# Altium PCB RK3399-core.PcbDoc
Units mm, origin at the board's own origin, x right, y up, seen from the top; angles counter-clockwise.
Board outline 50 x 50 mm, 2 copper layers (Top Layer, Bottom Layer); 6 components, 15 nets, 1337 pads, 0 vias.
Unrouted connection lines stored in the file: 307.
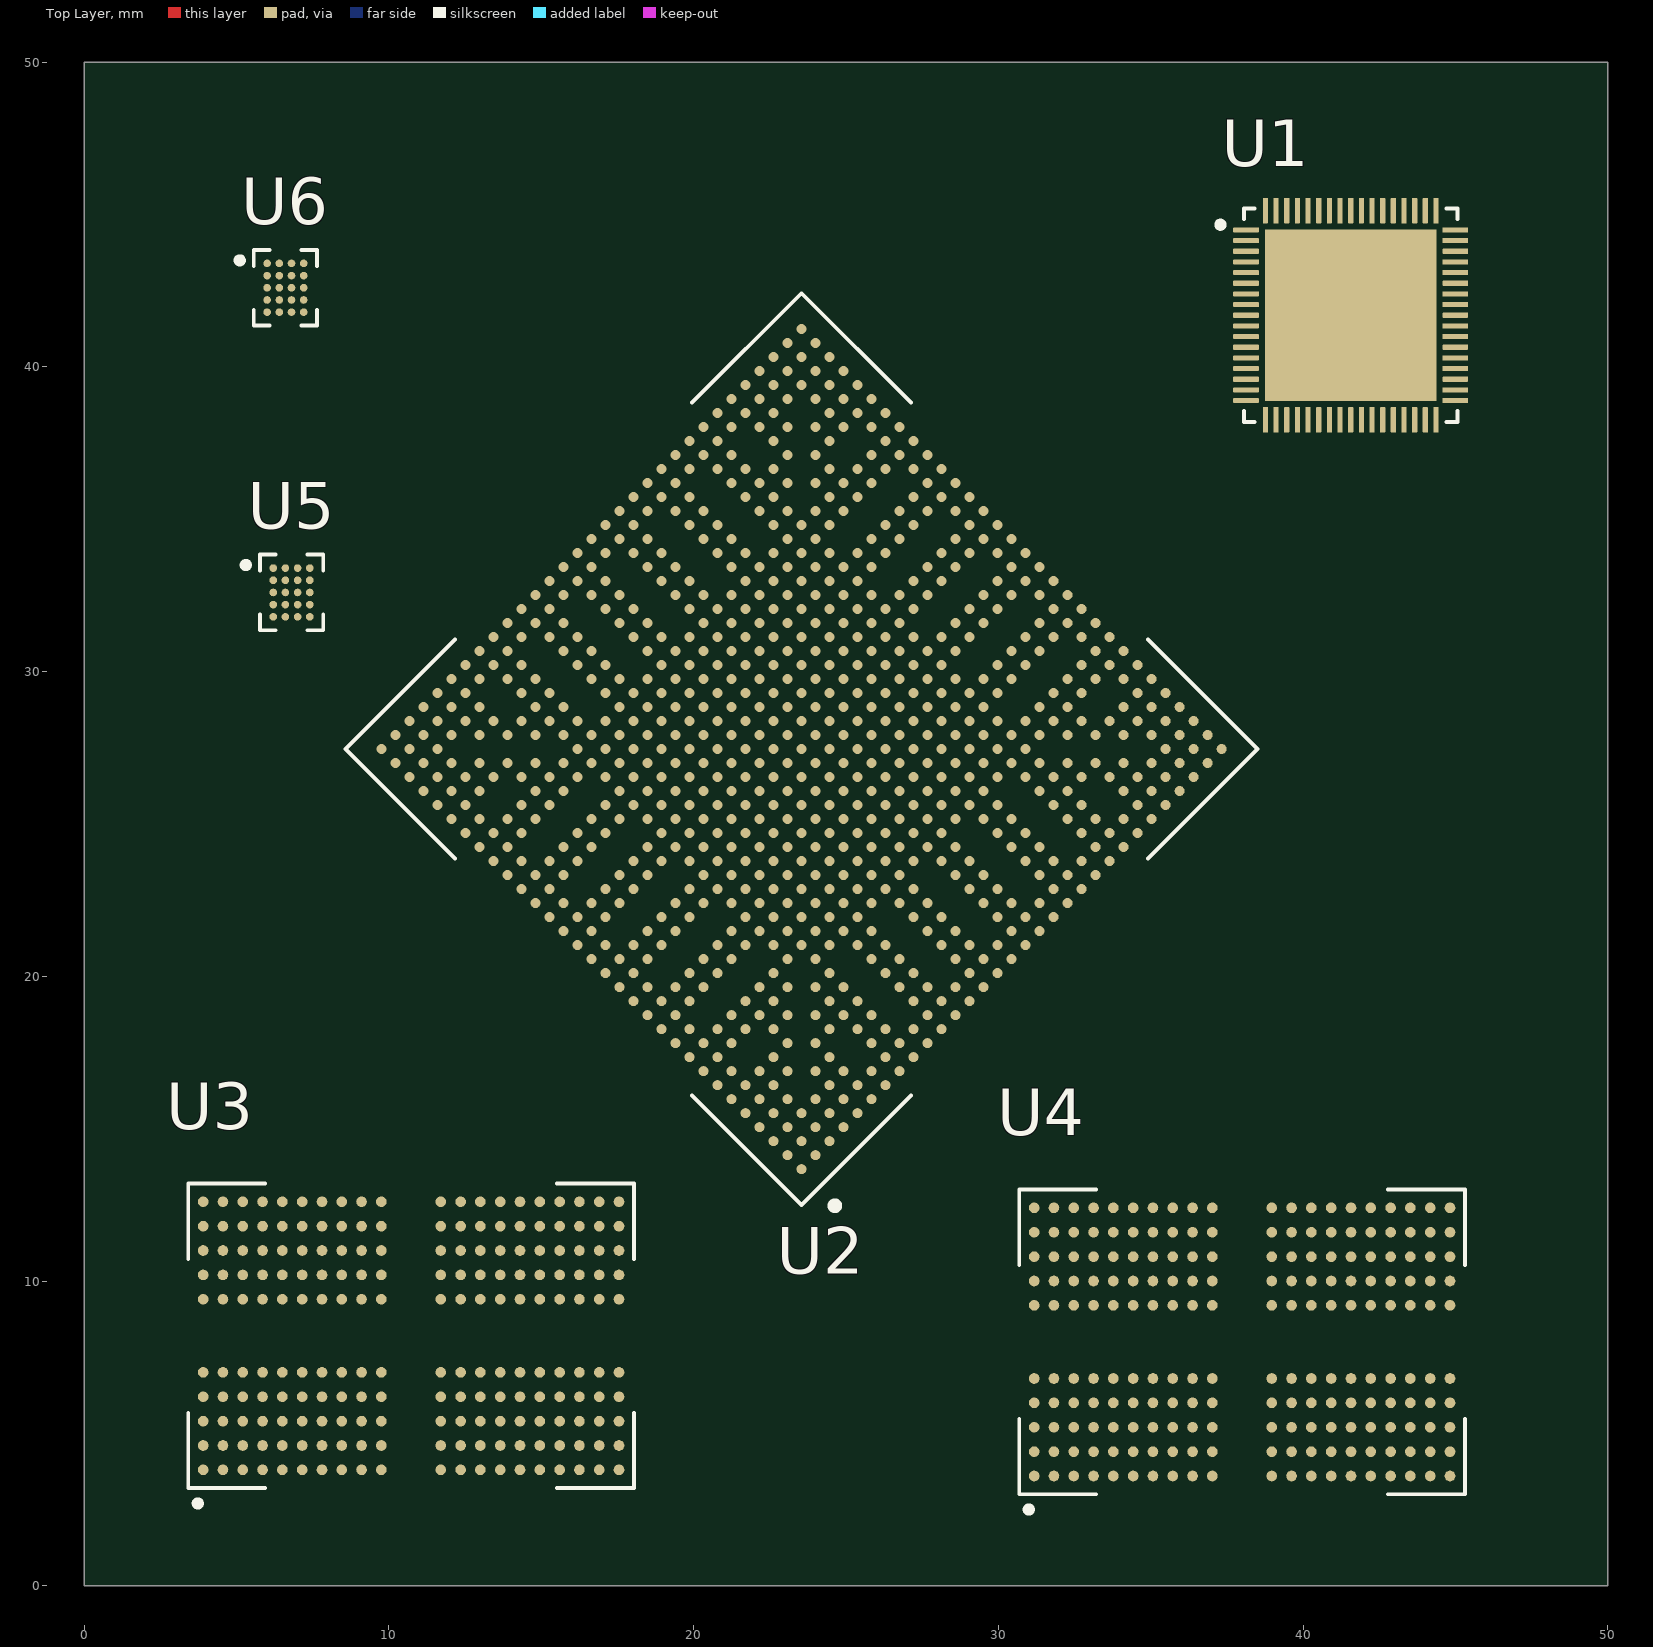
[diagram p0: Top Layer view]
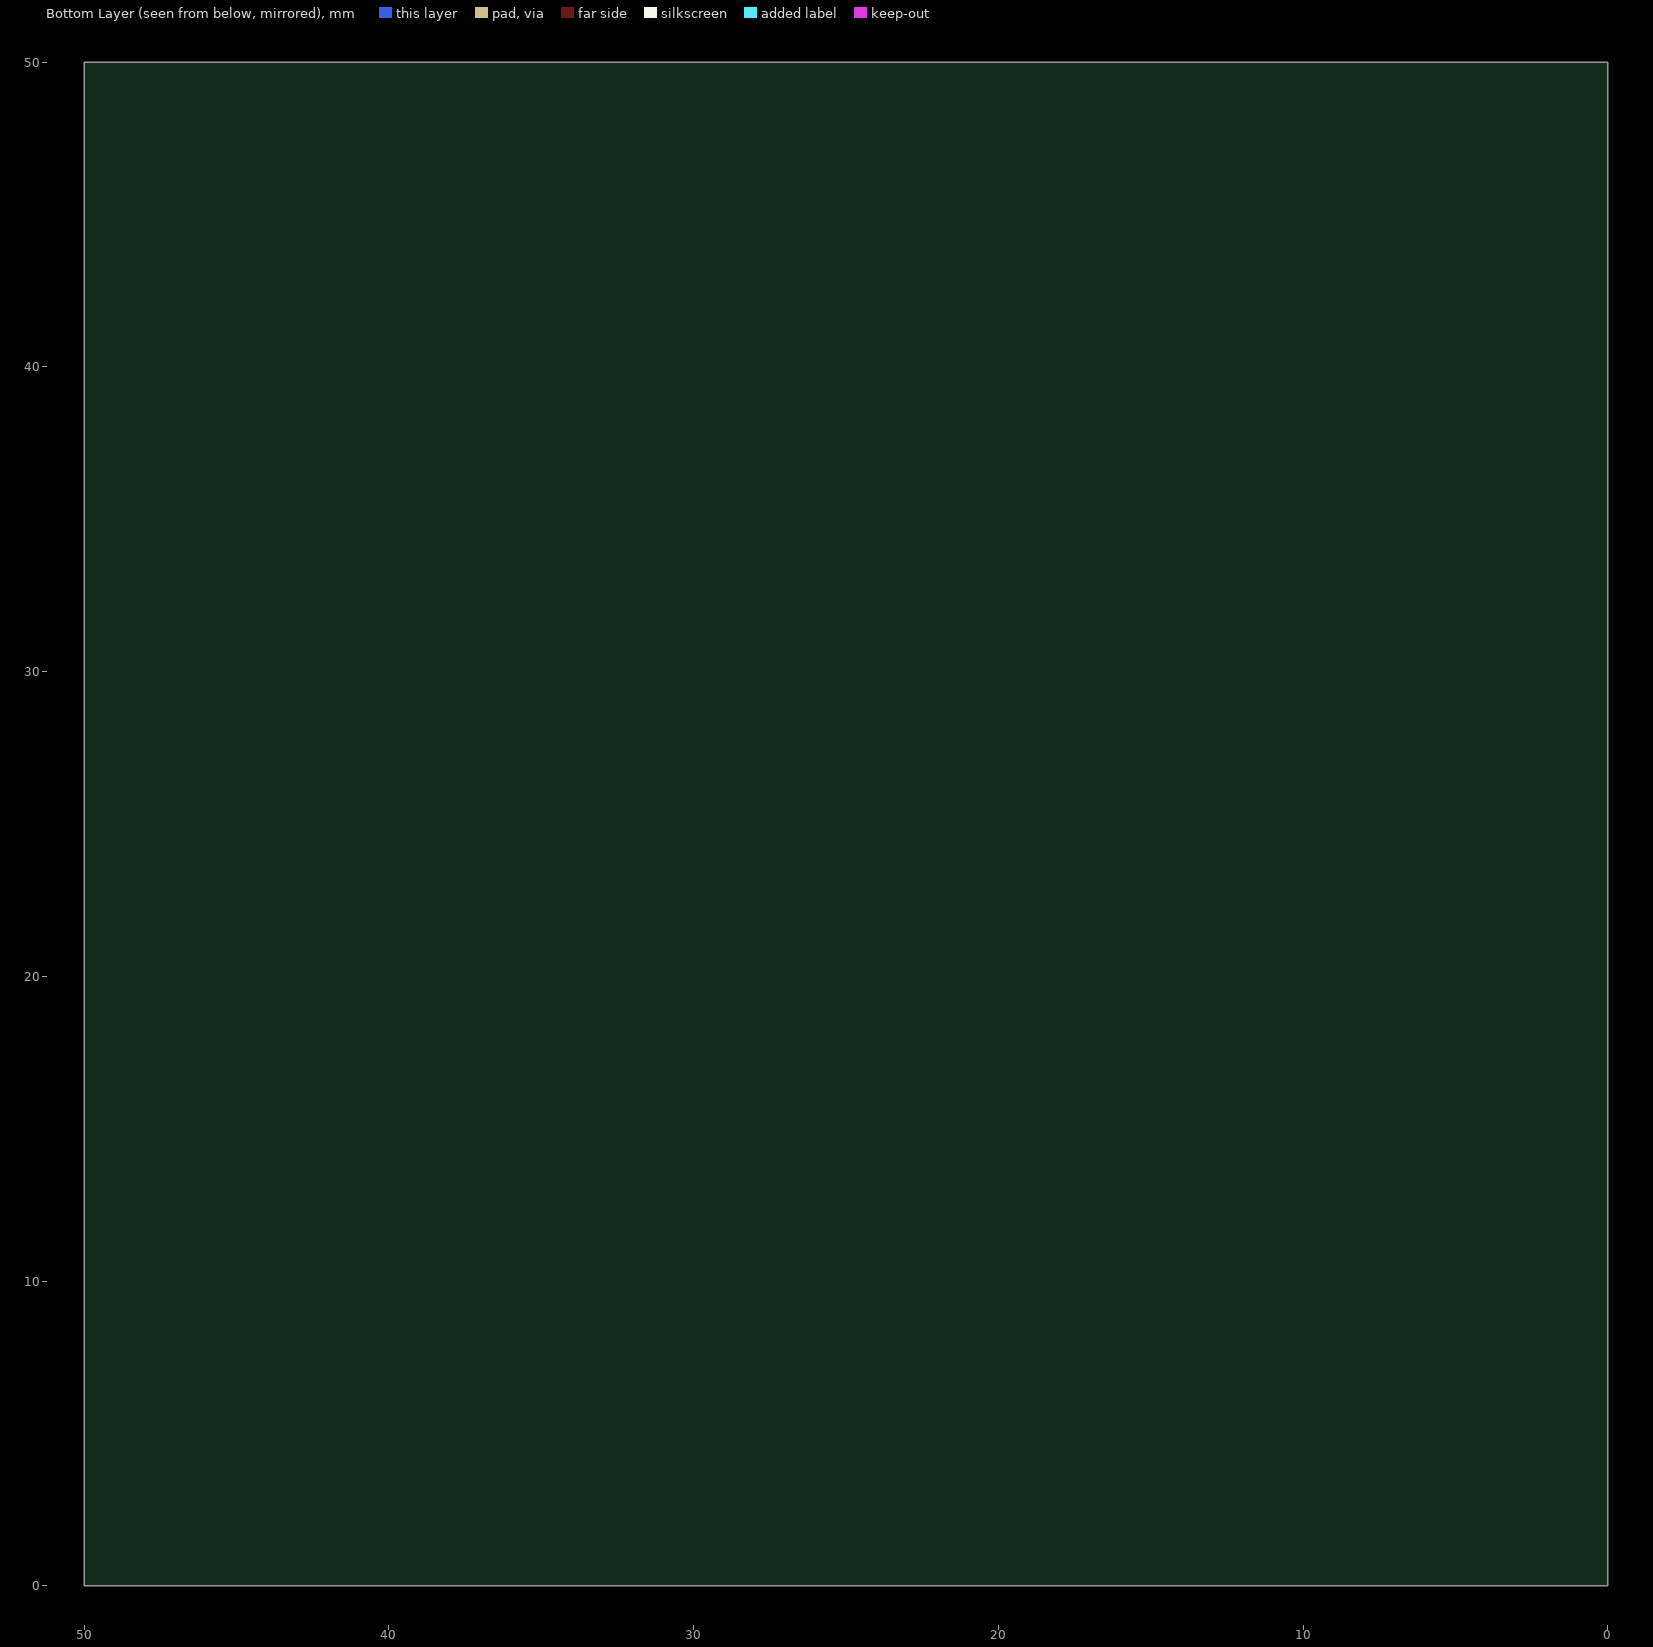
[diagram p1: Bottom Layer view, seen from below]

## Layer stack, top to bottom
Top Solder: solder mask 0.0102, Solder Resist, Dk 3.5
Top Layer: signal copper 0.0356
Dielectric 1: dielectric 0.32, FR-4, Dk 4.8
Bottom Layer: signal copper 0.0356
Bottom Solder: solder mask 0.0102, Solder Resist, Dk 3.5

## Board outline
0,0 50,0 50,50 0,50

## Design rules (kind name [scope] priority, off if disabled: settings)
Clearance [All] p1: gap=0.254 ignorepadtopadclearanceinfootprint=FALSE except(0: Arc-Hole Track-Hole SMDPad-Hole THPad-Hole Via-Hole Fill-Hole Poly-Hole Region-Hole Text-Hole)
PolygonConnect [All] p1: connectstyle=Relief reliefconductorwidth=0.254 reliefentries=4 polygonreliefangle="90 Angle" airgapwidth=0.254
RoutingVias [All] p1: holewidth=0.711 width=1.27 viastyle="Through Hole" minholewidth=0.711 minwidth=1.27 maxholewidth=0.711 maxwidth=1.27
SolderMaskExpansion [All] p1: expansion=0.102 istentingtop=FALSE
Width [All] p1: maxlimit=0.254 minlimit=0.254 preferedwidth=0.254
30 further rules are at their usual default settings.

## Classes and differential pairs
component class 10.LPDDR4: U3 U4
component class "03.RK3399 Power": U2
component class "02.PMIC PMU": U1 U5 U6

## Components (designator, comment, footprint, x,y, rotation, side; value= is the part's Value field where it differs from the comment)
U1 "RK808-D" QFN35P700X700X80-69N 41.565,41.7 r0 top
U2 "RK3399" BGA828C65P31X31_2100X2100X161N 23.54,27.46 r135 top
U3 "MT53D1024M32D4DT-046_AUT_D" IC_MT53D1024M32D4DT-046_AUT_D 10.725,8.2 r90 top
U4 "MT53D1024M32D4DT-046_AUT_D" IC_MT53D1024M32D4DT-046_AUT_D 38,8 r90 top
U5 "SYR837PKC" BGA20N40P5X4_196X156X66N 6.8,32.6 r0 top
U6 "SYR838PKC" BGA20N40P5X4_196X156X66N 6.6,42.6 r0 top

## Footprints (in the part's own frame and the unit in brackets; to place one, negate y for a bottom-side part, rotate by r counter-clockwise, add the part's x,y. Pads: shape width x height; smd on the part's side, far side on the other; paste and mask are expansions set on the pad)
BGA20N40P5X4_196X156X66N [mm]
  round 0.25 smd: A1(-0.6,0.8) A2(-0.2,0.8) A3(0.2,0.8) A4(0.6,0.8) B1(-0.6,0.4) B2(-0.2,0.4) B3(0.2,0.4) B4(0.6,0.4) C1(-0.6,0) C2(-0.2,0) C3(0.2,0) C4(0.6,0) D1(-0.6,-0.4) D2(-0.2,-0.4) D3(0.2,-0.4) D4(0.6,-0.4) E1(-0.6,-0.8) E2(-0.2,-0.8) E3(0.2,-0.8) E4(0.6,-0.8)
  silkscreen extent -1.6,-1.24 1.04,1.24
BGA828C65P31X31_2100X2100X161N [mm]
  round 0.33 smd: A1(-9.75,9.75) A2(-9.1,9.75) A3(-8.45,9.75) A4(-7.8,9.75) A5(-7.15,9.75) A6(-6.5,9.75) A7(-5.85,9.75) A8(-5.2,9.75) A9(-4.55,9.75) A10(-3.9,9.75) A11(-3.25,9.75) A12(-2.6,9.75) A13(-1.95,9.75) A14(-1.3,9.75) A15(-0.65,9.75) A16(0,9.75) A17(0.65,9.75) A18(1.3,9.75) A19(1.95,9.75) A20(2.6,9.75) A21(3.25,9.75) A22(3.9,9.75) A23(4.55,9.75) A24(5.2,9.75) A25(5.85,9.75) A26(6.5,9.75) A27(7.15,9.75) A28(7.8,9.75) A29(8.45,9.75) A30(9.1,9.75) A31(9.75,9.75) AA1(-9.75,-3.25) AA2(-9.1,-3.25) AA3(-8.45,-3.25) AA4(-7.8,-3.25) AA5(-7.15,-3.25) AA6(-6.5,-3.25) AA7(-5.85,-3.25) AA8(-5.2,-3.25) AA9(-4.55,-3.25) AA10(-3.9,-3.25) AA11(-3.25,-3.25) AA12(-2.6,-3.25) AA13(-1.95,-3.25) AA14(-1.3,-3.25) AA15(-0.65,-3.25) AA16(0,-3.25) AA17(0.65,-3.25) AA18(1.3,-3.25) AA19(1.95,-3.25) AA20(2.6,-3.25) AA21(3.25,-3.25) AA22(3.9,-3.25) AA23(4.55,-3.25) AA24(5.2,-3.25) AA25(5.85,-3.25) AA26(6.5,-3.25) AA27(7.15,-3.25) AA28(7.8,-3.25) AA29(8.45,-3.25) AA30(9.1,-3.25) AA31(9.75,-3.25) AB1(-9.75,-3.9) AB2(-9.1,-3.9) AB8(-5.2,-3.9) AB9(-4.55,-3.9) AB10(-3.9,-3.9) AB11(-3.25,-3.9) AB12(-2.6,-3.9) AB13(-1.95,-3.9) AB14(-1.3,-3.9) AB15(-0.65,-3.9) AB16(0,-3.9) AB17(0.65,-3.9) AB18(1.3,-3.9) AB19(1.95,-3.9) AB20(2.6,-3.9) AB21(3.25,-3.9) AB22(3.9,-3.9) AB23(4.55,-3.9) AB24(5.2,-3.9) AB30(9.1,-3.9) AB31(9.75,-3.9) AC1(-9.75,-4.55) AC2(-9.1,-4.55) AC3(-8.45,-4.55) AC4(-7.8,-4.55) AC5(-7.15,-4.55) AC6(-6.5,-4.55) AC7(-5.85,-4.55) AC8(-5.2,-4.55) AC9(-4.55,-4.55) AC10(-3.9,-4.55) AC11(-3.25,-4.55) AC12(-2.6,-4.55) AC13(-1.95,-4.55) AC14(-1.3,-4.55) AC15(-0.65,-4.55) AC16(0,-4.55) AC17(0.65,-4.55) AC18(1.3,-4.55) AC19(1.95,-4.55) AC20(2.6,-4.55) AC21(3.25,-4.55) AC22(3.9,-4.55) AC23(4.55,-4.55) AC24(5.2,-4.55) AC25(5.85,-4.55) AC26(6.5,-4.55) AC27(7.15,-4.55) AC28(7.8,-4.55) AC29(8.45,-4.55) AC30(9.1,-4.55) AC31(9.75,-4.55) AD1(-9.75,-5.2) AD2(-9.1,-5.2) AD3(-8.45,-5.2) AD4(-7.8,-5.2) AD5(-7.15,-5.2) AD6(-6.5,-5.2) AD7(-5.85,-5.2) AD8(-5.2,-5.2) AD9(-4.55,-5.2) AD10(-3.9,-5.2) AD11(-3.25,-5.2) AD12(-2.6,-5.2) AD13(-1.95,-5.2) AD14(-1.3,-5.2) AD15(-0.65,-5.2) AD16(0,-5.2) AD17(0.65,-5.2) AD18(1.3,-5.2) AD19(1.95,-5.2) AD20(2.6,-5.2) AD21(3.25,-5.2) AD22(3.9,-5.2) AD23(4.55,-5.2) AD24(5.2,-5.2) AD25(5.85,-5.2) AD26(6.5,-5.2) AD27(7.15,-5.2) AD28(7.8,-5.2) AD29(8.45,-5.2) AD30(9.1,-5.2) AD31(9.75,-5.2) AE1(-9.75,-5.85) AE2(-9.1,-5.85) AE5(-7.15,-5.85) AE6(-6.5,-5.85) AE8(-5.2,-5.85) AE9(-4.55,-5.85) AE11(-3.25,-5.85) AE12(-2.6,-5.85) AE14(-1.3,-5.85) AE15(-0.65,-5.85) AE17(0.65,-5.85) AE18(1.3,-5.85) AE20(2.6,-5.85) AE21(3.25,-5.85) AE23(4.55,-5.85) AE24(5.2,-5.85) AE26(6.5,-5.85) AE27(7.15,-5.85) AE30(9.1,-5.85) AE31(9.75,-5.85) AF1(-9.75,-6.5) AF2(-9.1,-6.5) AF3(-8.45,-6.5) AF4(-7.8,-6.5) AF5(-7.15,-6.5) AF7(-5.85,-6.5) AF8(-5.2,-6.5) AF9(-4.55,-6.5) AF11(-3.25,-6.5) AF12(-2.6,-6.5) AF14(-1.3,-6.5) AF15(-0.65,-6.5) AF17(0.65,-6.5) AF18(1.3,-6.5) AF20(2.6,-6.5) AF21(3.25,-6.5) AF23(4.55,-6.5) AF24(5.2,-6.5) AF25(5.85,-6.5) AF27(7.15,-6.5) AF28(7.8,-6.5) AF29(8.45,-6.5) AF30(9.1,-6.5) AF31(9.75,-6.5) AG1(-9.75,-7.15) AG2(-9.1,-7.15) AG3(-8.45,-7.15) AG4(-7.8,-7.15) AG6(-6.5,-7.15) AG7(-5.85,-7.15) AG8(-5.2,-7.15) AG9(-4.55,-7.15) AG11(-3.25,-7.15) AG12(-2.6,-7.15) AG14(-1.3,-7.15) AG15(-0.65,-7.15) AG17(0.65,-7.15) AG18(1.3,-7.15) AG20(2.6,-7.15) AG21(3.25,-7.15) AG23(4.55,-7.15) AG24(5.2,-7.15) AG25(5.85,-7.15) AG26(6.5,-7.15) AG28(7.8,-7.15) AG29(8.45,-7.15) AG30(9.1,-7.15) AG31(9.75,-7.15) AH1(-9.75,-7.8) AH2(-9.1,-7.8) AH3(-8.45,-7.8) AH5(-7.15,-7.8) AH6(-6.5,-7.8) AH8(-5.2,-7.8) AH9(-4.55,-7.8) AH11(-3.25,-7.8) AH12(-2.6,-7.8) AH14(-1.3,-7.8) AH15(-0.65,-7.8) AH17(0.65,-7.8) AH18(1.3,-7.8) AH20(2.6,-7.8) AH21(3.25,-7.8) AH23(4.55,-7.8) AH24(5.2,-7.8) AH26(6.5,-7.8) AH27(7.15,-7.8) AH29(8.45,-7.8) AH30(9.1,-7.8) AH31(9.75,-7.8) AJ1(-9.75,-8.45) AJ2(-9.1,-8.45) AJ3(-8.45,-8.45) AJ4(-7.8,-8.45) AJ5(-7.15,-8.45) AJ6(-6.5,-8.45) AJ8(-5.2,-8.45) AJ9(-4.55,-8.45) AJ11(-3.25,-8.45) AJ12(-2.6,-8.45) AJ14(-1.3,-8.45) AJ15(-0.65,-8.45) AJ17(0.65,-8.45) AJ18(1.3,-8.45) AJ20(2.6,-8.45) AJ21(3.25,-8.45) AJ23(4.55,-8.45) AJ24(5.2,-8.45) AJ26(6.5,-8.45) AJ27(7.15,-8.45) AJ28(7.8,-8.45) AJ29(8.45,-8.45) AJ30(9.1,-8.45) AJ31(9.75,-8.45) AK1(-9.75,-9.1) AK2(-9.1,-9.1) AK3(-8.45,-9.1) AK4(-7.8,-9.1) AK5(-7.15,-9.1) AK6(-6.5,-9.1) AK7(-5.85,-9.1) AK8(-5.2,-9.1) AK9(-4.55,-9.1) AK10(-3.9,-9.1) AK11(-3.25,-9.1) AK12(-2.6,-9.1) AK13(-1.95,-9.1) AK14(-1.3,-9.1) AK15(-0.65,-9.1) AK16(0,-9.1) AK17(0.65,-9.1) AK18(1.3,-9.1) AK19(1.95,-9.1) AK20(2.6,-9.1) AK21(3.25,-9.1) AK22(3.9,-9.1) AK23(4.55,-9.1) AK24(5.2,-9.1) AK25(5.85,-9.1) AK26(6.5,-9.1) AK27(7.15,-9.1) AK28(7.8,-9.1) AK29(8.45,-9.1) AK30(9.1,-9.1) AK31(9.75,-9.1) AL1(-9.75,-9.75) AL2(-9.1,-9.75) AL3(-8.45,-9.75) AL4(-7.8,-9.75) AL5(-7.15,-9.75) AL6(-6.5,-9.75) AL7(-5.85,-9.75) AL8(-5.2,-9.75) AL9(-4.55,-9.75) AL10(-3.9,-9.75) AL11(-3.25,-9.75) AL12(-2.6,-9.75) AL13(-1.95,-9.75) AL14(-1.3,-9.75) AL15(-0.65,-9.75) AL16(0,-9.75) AL17(0.65,-9.75) AL18(1.3,-9.75) AL19(1.95,-9.75) AL20(2.6,-9.75) AL21(3.25,-9.75) AL22(3.9,-9.75) AL23(4.55,-9.75) AL24(5.2,-9.75) AL25(5.85,-9.75) AL26(6.5,-9.75) AL27(7.15,-9.75) AL28(7.8,-9.75) AL29(8.45,-9.75) AL30(9.1,-9.75) AL31(9.75,-9.75) B1(-9.75,9.1) B2(-9.1,9.1) B3(-8.45,9.1) B4(-7.8,9.1) B5(-7.15,9.1) B6(-6.5,9.1) B7(-5.85,9.1) B8(-5.2,9.1) B9(-4.55,9.1) B10(-3.9,9.1) B11(-3.25,9.1) B12(-2.6,9.1) B13(-1.95,9.1) B14(-1.3,9.1) B15(-0.65,9.1) B16(0,9.1) B17(0.65,9.1) B18(1.3,9.1) B19(1.95,9.1) B20(2.6,9.1) B21(3.25,9.1) B22(3.9,9.1) B23(4.55,9.1) B24(5.2,9.1) B25(5.85,9.1) B26(6.5,9.1) B27(7.15,9.1) B28(7.8,9.1) B29(8.45,9.1) B30(9.1,9.1) B31(9.75,9.1) C1(-9.75,8.45) C2(-9.1,8.45) C3(-8.45,8.45) C4(-7.8,8.45) C5(-7.15,8.45) C6(-6.5,8.45) C8(-5.2,8.45) C9(-4.55,8.45) C11(-3.25,8.45) C12(-2.6,8.45) C14(-1.3,8.45) C15(-0.65,8.45) C17(0.65,8.45) C18(1.3,8.45) C20(2.6,8.45) C21(3.25,8.45) C23(4.55,8.45) C24(5.2,8.45) C26(6.5,8.45) C27(7.15,8.45) C28(7.8,8.45) C29(8.45,8.45) C30(9.1,8.45) C31(9.75,8.45) D1(-9.75,7.8) D2(-9.1,7.8) D3(-8.45,7.8) D5(-7.15,7.8) D6(-6.5,7.8) D8(-5.2,7.8) D9(-4.55,7.8) D11(-3.25,7.8) D12(-2.6,7.8) D14(-1.3,7.8) D15(-0.65,7.8) D17(0.65,7.8) D18(1.3,7.8) D20(2.6,7.8) D21(3.25,7.8) D23(4.55,7.8) D24(5.2,7.8) D26(6.5,7.8) D27(7.15,7.8) D29(8.45,7.8) D30(9.1,7.8) D31(9.75,7.8) E1(-9.75,7.15) E2(-9.1,7.15) E3(-8.45,7.15) E4(-7.8,7.15) E6(-6.5,7.15) E7(-5.85,7.15) E8(-5.2,7.15) E9(-4.55,7.15) E11(-3.25,7.15) E12(-2.6,7.15) E14(-1.3,7.15) E15(-0.65,7.15) E17(0.65,7.15) E18(1.3,7.15) E20(2.6,7.15) E21(3.25,7.15) E23(4.55,7.15) E24(5.2,7.15) E25(5.85,7.15) E26(6.5,7.15) E28(7.8,7.15) E29(8.45,7.15) E30(9.1,7.15) E31(9.75,7.15) F1(-9.75,6.5) F2(-9.1,6.5) F3(-8.45,6.5) F4(-7.8,6.5) F5(-7.15,6.5) F7(-5.85,6.5) F8(-5.2,6.5) F9(-4.55,6.5) F11(-3.25,6.5) F12(-2.6,6.5) F14(-1.3,6.5) F15(-0.65,6.5) F17(0.65,6.5) F18(1.3,6.5) F20(2.6,6.5) F21(3.25,6.5) F23(4.55,6.5) F24(5.2,6.5) F25(5.85,6.5) F27(7.15,6.5) F28(7.8,6.5) F29(8.45,6.5) F30(9.1,6.5) F31(9.75,6.5) G1(-9.75,5.85) G2(-9.1,5.85) G5(-7.15,5.85) G6(-6.5,5.85) G8(-5.2,5.85) G9(-4.55,5.85) G11(-3.25,5.85) G12(-2.6,5.85) G14(-1.3,5.85) G15(-0.65,5.85) G17(0.65,5.85) G18(1.3,5.85) G20(2.6,5.85) G21(3.25,5.85) G23(4.55,5.85) G24(5.2,5.85) G26(6.5,5.85) G27(7.15,5.85) G30(9.1,5.85) G31(9.75,5.85) H1(-9.75,5.2) H2(-9.1,5.2) H3(-8.45,5.2) H4(-7.8,5.2) H5(-7.15,5.2) H6(-6.5,5.2) H7(-5.85,5.2) H9(-4.55,5.2) H10(-3.9,5.2) H11(-3.25,5.2) H12(-2.6,5.2) H13(-1.95,5.2) H14(-1.3,5.2) H15(-0.65,5.2) H16(0,5.2) H17(0.65,5.2) H18(1.3,5.2) H19(1.95,5.2) H20(2.6,5.2) H21(3.25,5.2) H22(3.9,5.2) H23(4.55,5.2) H24(5.2,5.2) H25(5.85,5.2) H26(6.5,5.2) H27(7.15,5.2) H28(7.8,5.2) H29(8.45,5.2) H30(9.1,5.2) H31(9.75,5.2) J1(-9.75,4.55) J2(-9.1,4.55) J3(-8.45,4.55) J4(-7.8,4.55) J5(-7.15,4.55) J6(-6.5,4.55) J7(-5.85,4.55) J8(-5.2,4.55) J9(-4.55,4.55) J10(-3.9,4.55) J11(-3.25,4.55) J12(-2.6,4.55) J13(-1.95,4.55) J14(-1.3,4.55) J15(-0.65,4.55) J16(0,4.55) J17(0.65,4.55) J18(1.3,4.55) J19(1.95,4.55) J20(2.6,4.55) J21(3.25,4.55) J22(3.9,4.55) J23(4.55,4.55) J24(5.2,4.55) J25(5.85,4.55) J26(6.5,4.55) J27(7.15,4.55) J28(7.8,4.55) J29(8.45,4.55) J30(9.1,4.55) J31(9.75,4.55) K1(-9.75,3.9) K2(-9.1,3.9) K8(-5.2,3.9) K9(-4.55,3.9) K10(-3.9,3.9) K11(-3.25,3.9) K12(-2.6,3.9) K13(-1.95,3.9) K14(-1.3,3.9) K15(-0.65,3.9) K16(0,3.9) K17(0.65,3.9) K18(1.3,3.9) K19(1.95,3.9) K20(2.6,3.9) K21(3.25,3.9) K22(3.9,3.9) K23(4.55,3.9) K24(5.2,3.9) K30(9.1,3.9) K31(9.75,3.9) L1(-9.75,3.25) L2(-9.1,3.25) L3(-8.45,3.25) L4(-7.8,3.25) L5(-7.15,3.25) L6(-6.5,3.25) L7(-5.85,3.25) L8(-5.2,3.25) L9(-4.55,3.25) L10(-3.9,3.25) L11(-3.25,3.25) L12(-2.6,3.25) L13(-1.95,3.25) L14(-1.3,3.25) L15(-0.65,3.25) L16(0,3.25) L17(0.65,3.25) L18(1.3,3.25) L19(1.95,3.25) L20(2.6,3.25) L21(3.25,3.25) L22(3.9,3.25) L23(4.55,3.25) L24(5.2,3.25) L25(5.85,3.25) L26(6.5,3.25) L27(7.15,3.25) L28(7.8,3.25) L29(8.45,3.25) L30(9.1,3.25) L31(9.75,3.25) M1(-9.75,2.6) M2(-9.1,2.6) M3(-8.45,2.6) M4(-7.8,2.6) M5(-7.15,2.6) M6(-6.5,2.6) M7(-5.85,2.6) M8(-5.2,2.6) M9(-4.55,2.6) M10(-3.9,2.6) M11(-3.25,2.6) M12(-2.6,2.6) M13(-1.95,2.6) M14(-1.3,2.6) M15(-0.65,2.6) M16(0,2.6) M17(0.65,2.6) M18(1.3,2.6) M19(1.95,2.6) M20(2.6,2.6) M21(3.25,2.6) M22(3.9,2.6) M23(4.55,2.6) M24(5.2,2.6) M25(5.85,2.6) M26(6.5,2.6) M27(7.15,2.6) M28(7.8,2.6) M29(8.45,2.6) M30(9.1,2.6) M31(9.75,2.6) N1(-9.75,1.95) N2(-9.1,1.95) N8(-5.2,1.95) N9(-4.55,1.95) N10(-3.9,1.95) N11(-3.25,1.95) N12(-2.6,1.95) N13(-1.95,1.95) N14(-1.3,1.95) N15(-0.65,1.95) N16(0,1.95) N17(0.65,1.95) N18(1.3,1.95) N19(1.95,1.95) N20(2.6,1.95) N21(3.25,1.95) N22(3.9,1.95) N23(4.55,1.95) N24(5.2,1.95) N30(9.1,1.95) N31(9.75,1.95) P1(-9.75,1.3) P2(-9.1,1.3) P3(-8.45,1.3) P4(-7.8,1.3) P5(-7.15,1.3) P6(-6.5,1.3) P7(-5.85,1.3) P8(-5.2,1.3) P9(-4.55,1.3) P10(-3.9,1.3) P11(-3.25,1.3) P12(-2.6,1.3) P13(-1.95,1.3) P14(-1.3,1.3) P15(-0.65,1.3) P16(0,1.3) P17(0.65,1.3) P18(1.3,1.3) P19(1.95,1.3) P20(2.6,1.3) P21(3.25,1.3) P22(3.9,1.3) P23(4.55,1.3) P24(5.2,1.3) P25(5.85,1.3) P26(6.5,1.3) P27(7.15,1.3) P28(7.8,1.3) P29(8.45,1.3) P30(9.1,1.3) P31(9.75,1.3) R1(-9.75,0.65) R2(-9.1,0.65) R3(-8.45,0.65) R4(-7.8,0.65) R5(-7.15,0.65) R6(-6.5,0.65) R7(-5.85,0.65) R8(-5.2,0.65) R9(-4.55,0.65) R10(-3.9,0.65) R11(-3.25,0.65) R12(-2.6,0.65) R13(-1.95,0.65) R14(-1.3,0.65) R15(-0.65,0.65) R16(0,0.65) R17(0.65,0.65) R18(1.3,0.65) R19(1.95,0.65) R20(2.6,0.65) R21(3.25,0.65) R22(3.9,0.65) R23(4.55,0.65) R24(5.2,0.65) R25(5.85,0.65) R26(6.5,0.65) R27(7.15,0.65) R28(7.8,0.65) R29(8.45,0.65) R30(9.1,0.65) R31(9.75,0.65) T1(-9.75,0) T2(-9.1,0) T8(-5.2,0) T9(-4.55,0) T10(-3.9,0) T11(-3.25,0) T12(-2.6,0) T13(-1.95,0) T14(-1.3,0) T15(-0.65,0) T16(0,0) T17(0.65,0) T18(1.3,0) T19(1.95,0) T20(2.6,0) T21(3.25,0) T22(3.9,0) T23(4.55,0) T24(5.2,0) T30(9.1,0) T31(9.75,0) U1(-9.75,-0.65) U2(-9.1,-0.65) U3(-8.45,-0.65) U4(-7.8,-0.65) U5(-7.15,-0.65) U6(-6.5,-0.65) U7(-5.85,-0.65) U8(-5.2,-0.65) U9(-4.55,-0.65) U10(-3.9,-0.65) U11(-3.25,-0.65) U12(-2.6,-0.65) U13(-1.95,-0.65) U14(-1.3,-0.65) U15(-0.65,-0.65) U16(0,-0.65) U17(0.65,-0.65) U18(1.3,-0.65) U19(1.95,-0.65) U20(2.6,-0.65) U21(3.25,-0.65) U22(3.9,-0.65) U23(4.55,-0.65) U24(5.2,-0.65) U25(5.85,-0.65) U26(6.5,-0.65) U27(7.15,-0.65) U28(7.8,-0.65) U29(8.45,-0.65) U30(9.1,-0.65) U31(9.75,-0.65) V1(-9.75,-1.3) V2(-9.1,-1.3) V3(-8.45,-1.3) V4(-7.8,-1.3) V5(-7.15,-1.3) V6(-6.5,-1.3) V7(-5.85,-1.3) V8(-5.2,-1.3) V9(-4.55,-1.3) V10(-3.9,-1.3) V11(-3.25,-1.3) V12(-2.6,-1.3) V13(-1.95,-1.3) V14(-1.3,-1.3) V15(-0.65,-1.3) V16(0,-1.3) V17(0.65,-1.3) V18(1.3,-1.3) V19(1.95,-1.3) V20(2.6,-1.3) V21(3.25,-1.3) V22(3.9,-1.3) V23(4.55,-1.3) V24(5.2,-1.3) V25(5.85,-1.3) V26(6.5,-1.3) V27(7.15,-1.3) V28(7.8,-1.3) V29(8.45,-1.3) V30(9.1,-1.3) V31(9.75,-1.3) W1(-9.75,-1.95) W2(-9.1,-1.95) W8(-5.2,-1.95) W9(-4.55,-1.95) W10(-3.9,-1.95) W11(-3.25,-1.95) W12(-2.6,-1.95) W13(-1.95,-1.95) W14(-1.3,-1.95) W15(-0.65,-1.95) W16(0,-1.95) W17(0.65,-1.95) W18(1.3,-1.95) W19(1.95,-1.95) W20(2.6,-1.95) W21(3.25,-1.95) W22(3.9,-1.95) W23(4.55,-1.95) W24(5.2,-1.95) W30(9.1,-1.95) W31(9.75,-1.95) Y1(-9.75,-2.6) Y2(-9.1,-2.6) Y3(-8.45,-2.6) Y4(-7.8,-2.6) Y5(-7.15,-2.6) Y6(-6.5,-2.6) Y7(-5.85,-2.6) Y8(-5.2,-2.6) Y9(-4.55,-2.6) Y10(-3.9,-2.6) Y11(-3.25,-2.6) Y12(-2.6,-2.6) Y13(-1.95,-2.6) Y14(-1.3,-2.6) Y15(-0.65,-2.6) Y16(0,-2.6) Y17(0.65,-2.6) Y18(1.3,-2.6) Y19(1.95,-2.6) Y20(2.6,-2.6) Y21(3.25,-2.6) Y22(3.9,-2.6) Y23(4.55,-2.6) Y24(5.2,-2.6) Y25(5.85,-2.6) Y26(6.5,-2.6) Y27(7.15,-2.6) Y28(7.8,-2.6) Y29(8.45,-2.6) Y30(9.1,-2.6) Y31(9.75,-2.6)
  silkscreen extent -11.49,-10.58 10.58,10.58, body extent -10.5,-10.5 10.5,10.5, height 1.41
IC_MT53D1024M32D4DT-046_AUT_D [mm]
  round 0.35 smd: A1(-4.4,6.825) A2(-3.6,6.825) A3(-2.8,6.825) A4(-2,6.825) A5(-1.2,6.825) A8(1.2,6.825) A9(2,6.825) A10(2.8,6.825) A11(3.6,6.825) A12(4.4,6.825) AA1(-4.4,-6.175) AA2(-3.6,-6.175) AA3(-2.8,-6.175) AA4(-2,-6.175) AA5(-1.2,-6.175) AA8(1.2,-6.175) AA9(2,-6.175) AA10(2.8,-6.175) AA11(3.6,-6.175) AA12(4.4,-6.175) AB1(-4.4,-6.825) AB2(-3.6,-6.825) AB3(-2.8,-6.825) AB4(-2,-6.825) AB5(-1.2,-6.825) AB8(1.2,-6.825) AB9(2,-6.825) AB10(2.8,-6.825) AB11(3.6,-6.825) AB12(4.4,-6.825) B1(-4.4,6.175) B2(-3.6,6.175) B3(-2.8,6.175) B4(-2,6.175) B5(-1.2,6.175) B8(1.2,6.175) B9(2,6.175) B10(2.8,6.175) B11(3.6,6.175) B12(4.4,6.175) C1(-4.4,5.525) C2(-3.6,5.525) C3(-2.8,5.525) C4(-2,5.525) C5(-1.2,5.525) C8(1.2,5.525) C9(2,5.525) C10(2.8,5.525) C11(3.6,5.525) C12(4.4,5.525) D1(-4.4,4.875) D2(-3.6,4.875) D3(-2.8,4.875) D4(-2,4.875) D5(-1.2,4.875) D8(1.2,4.875) D9(2,4.875) D10(2.8,4.875) D11(3.6,4.875) D12(4.4,4.875) E1(-4.4,4.225) E2(-3.6,4.225) E3(-2.8,4.225) E4(-2,4.225) E5(-1.2,4.225) E8(1.2,4.225) E9(2,4.225) E10(2.8,4.225) E11(3.6,4.225) E12(4.4,4.225) F1(-4.4,3.575) F2(-3.6,3.575) F3(-2.8,3.575) F4(-2,3.575) F5(-1.2,3.575) F8(1.2,3.575) F9(2,3.575) F10(2.8,3.575) F11(3.6,3.575) F12(4.4,3.575) G1(-4.4,2.925) G2(-3.6,2.925) G3(-2.8,2.925) G4(-2,2.925) G5(-1.2,2.925) G8(1.2,2.925) G9(2,2.925) G10(2.8,2.925) G11(3.6,2.925) G12(4.4,2.925) H1(-4.4,2.275) H2(-3.6,2.275) H3(-2.8,2.275) H4(-2,2.275) H5(-1.2,2.275) H8(1.2,2.275) H9(2,2.275) H10(2.8,2.275) H11(3.6,2.275) H12(4.4,2.275) J1(-4.4,1.625) J2(-3.6,1.625) J3(-2.8,1.625) J4(-2,1.625) J5(-1.2,1.625) J8(1.2,1.625) J9(2,1.625) J10(2.8,1.625) J11(3.6,1.625) J12(4.4,1.625) K1(-4.4,0.975) K2(-3.6,0.975) K3(-2.8,0.975) K4(-2,0.975) K5(-1.2,0.975) K8(1.2,0.975) K9(2,0.975) K10(2.8,0.975) K11(3.6,0.975) K12(4.4,0.975) N1(-4.4,-0.975) N2(-3.6,-0.975) N3(-2.8,-0.975) N4(-2,-0.975) N5(-1.2,-0.975) N8(1.2,-0.975) N9(2,-0.975) N10(2.8,-0.975) N11(3.6,-0.975) N12(4.4,-0.975) P1(-4.4,-1.625) P2(-3.6,-1.625) P3(-2.8,-1.625) P4(-2,-1.625) P5(-1.2,-1.625) P8(1.2,-1.625) P9(2,-1.625) P10(2.8,-1.625) P11(3.6,-1.625) P12(4.4,-1.625) R1(-4.4,-2.275) R2(-3.6,-2.275) R3(-2.8,-2.275) R4(-2,-2.275) R5(-1.2,-2.275) R8(1.2,-2.275) R9(2,-2.275) R10(2.8,-2.275) R11(3.6,-2.275) R12(4.4,-2.275) T1(-4.4,-2.925) T2(-3.6,-2.925) T3(-2.8,-2.925) T4(-2,-2.925) T5(-1.2,-2.925) T8(1.2,-2.925) T9(2,-2.925) T10(2.8,-2.925) T11(3.6,-2.925) T12(4.4,-2.925) U1(-4.4,-3.575) U2(-3.6,-3.575) U3(-2.8,-3.575) U4(-2,-3.575) U5(-1.2,-3.575) U8(1.2,-3.575) U9(2,-3.575) U10(2.8,-3.575) U11(3.6,-3.575) U12(4.4,-3.575) V1(-4.4,-4.225) V2(-3.6,-4.225) V3(-2.8,-4.225) V4(-2,-4.225) V5(-1.2,-4.225) V8(1.2,-4.225) V9(2,-4.225) V10(2.8,-4.225) V11(3.6,-4.225) V12(4.4,-4.225) W1(-4.4,-4.875) W2(-3.6,-4.875) W3(-2.8,-4.875) W4(-2,-4.875) W5(-1.2,-4.875) W8(1.2,-4.875) W9(2,-4.875) W10(2.8,-4.875) W11(3.6,-4.875) W12(4.4,-4.875) Y1(-4.4,-5.525) Y2(-3.6,-5.525) Y3(-2.8,-5.525) Y4(-2,-5.525) Y5(-1.2,-5.525) Y8(1.2,-5.525) Y9(2,-5.525) Y10(2.8,-5.525) Y11(3.6,-5.525) Y12(4.4,-5.525)
  silkscreen extent -5.6,-7.31 5,7.31
QFN35P700X700X80-69N [mm]
  rrect25% 0.84x0.17 smd: 1(-3.435,2.8) 2(-3.435,2.45) 3(-3.435,2.1) 4(-3.435,1.75) 5(-3.435,1.4) 6(-3.435,1.05) 7(-3.435,0.7) 8(-3.435,0.35) 9(-3.435,0) 10(-3.435,-0.35) 11(-3.435,-0.7) 12(-3.435,-1.05) 13(-3.435,-1.4) 14(-3.435,-1.75) 15(-3.435,-2.1) 16(-3.435,-2.45) 17(-3.435,-2.8) 35(3.435,-2.8) 36(3.435,-2.45) 37(3.435,-2.1) 38(3.435,-1.75) 39(3.435,-1.4) 40(3.435,-1.05) 41(3.435,-0.7) 42(3.435,-0.35) 43(3.435,0) 44(3.435,0.35) 45(3.435,0.7) 46(3.435,1.05) 47(3.435,1.4) 48(3.435,1.75) 49(3.435,2.1) 50(3.435,2.45) 51(3.435,2.8)
  rrect25% 0.17x0.84 smd: 18(-2.8,-3.435) 19(-2.45,-3.435) 20(-2.1,-3.435) 21(-1.75,-3.435) 22(-1.4,-3.435) 23(-1.05,-3.435) 24(-0.7,-3.435) 25(-0.35,-3.435) 26(0,-3.435) 27(0.35,-3.435) 28(0.7,-3.435) 29(1.05,-3.435) 30(1.4,-3.435) 31(1.75,-3.435) 32(2.1,-3.435) 33(2.45,-3.435) 34(2.8,-3.435) 52(2.8,3.435) 53(2.45,3.435) 54(2.1,3.435) 55(1.75,3.435) 56(1.4,3.435) 57(1.05,3.435) 58(0.7,3.435) 59(0.35,3.435) 60(0,3.435) 61(-0.35,3.435) 62(-0.7,3.435) 63(-1.05,3.435) 64(-1.4,3.435) 65(-1.75,3.435) 66(-2.1,3.435) 67(-2.45,3.435) 68(-2.8,3.435)
  rect 5.63x5.63 smd paste-4: 69(0,0)
  silkscreen extent -4.37,-3.5 3.5,3.5

## Part data
U1: "Power Management System", Package=None, Availability=Unavailable, MF="Fuzhou Rockchip Electronics Co", MP=RK808-D, Price=None, SnapEDA_Link=https://www.snapeda.com/parts/RK808-D/Fuzhou%20Rockchip%20Electronics%20Co/view-part/1600581/?ref=snap
U2: "RK3399 ROCK Pi 4 Model A 2GB - ARMÂ® CortexÂ®-A53, CortexÂ®-A72 MPU Embedded Evaluation Board", Package="Seeed Technology", Availability="Not in stock", Check_prices=https://www.snapeda.com/parts/RK3399/Fuzhou+Rockchip+Electronics+Co/view-part/?ref=eda, MF=Rockchip, MP=RK3399, Price=None, SnapEDA_Link=https://www.snapeda.com/parts/RK3399/Fuzhou+Rockchip+Electronics+Co/view-part/?ref=snap
U3 U4: Package=None, Availability=Unavailable, MP=MT53D1024M32D4DT-046_AUT_D, Price=None
U5: "SYR837/SYR838 is a high efficiency 2.4MHz synchronous step down DC/DC regulator IC capable of delivering up to 6A output currents.", Package=None, Availability=Unavailable, MF=Silergy, MP=SYR837PKC, Price=None, SnapEDA_Link=https://www.snapeda.com/parts/SYR837PKC/Silergy/view-part/2756982/?ref=snap
U6: library part SYR837PKC, "SYR837/SYR838 is a high efficiency 2.4MHz synchronous step down DC/DC regulator IC capable of delivering up to 6A output currents.", Package=None, Availability=Unavailable, MF=Silergy, MP=SYR837PKC, Price=None, SnapEDA_Link=https://www.snapeda.com/parts/SYR837PKC/Silergy/view-part/2756982/?ref=snap

## Nets (pads, with @x,y where several pads share a name; then routed paths per layer and width w, separated by ;. In a path a pad name is that pad's centre, name@x,y a point inside that pad or via, vN(x,y) a via of type N, cw(c..) or ccw(c..) an arc to the next point about the centre after c; other vN are vias at no path point)
GND: U1.21 U1.22 U1.27 U1.28 U1.30 U1.38 U1.40 U1.41 U1.46 U1.57 U1.62 U1.64 U1.69 U2.A1 U2.A27 U2.A31 U2.AA3 U2.AA5 U2.AA9 U2.AA10 U2.AA11 U2.AA12 U2.AA13 U2.AA14 U2.AA15 U2.AA23 U2.AA26 U2.AA29 U2.AB9 U2.AB10 U2.AB11 U2.AB13 U2.AB15 U2.AB16 U2.AB17 U2.AB19 U2.AB23 U2.AC3 U2.AC11 U2.AC13 U2.AC15 U2.AC16 U2.AC17 U2.AC18 U2.AC20 U2.AC21 U2.AC22 U2.AC23 U2.AC25 U2.AC26 U2.AC29 U2.AD3 U2.AD5 U2.AD10 U2.AD13 U2.AD17 U2.AD21 U2.AD22 U2.AD26 U2.AD29 U2.AE11 U2.AE12 U2.AE14 U2.AE17 U2.AE23 U2.AE27 U2.AF9 U2.AF17 U2.AF18 U2.AF20 U2.AF23 U2.AF24 U2.AF29 U2.AG2 U2.AG29 U2.AH29 U2.AJ5 U2.AJ6 U2.AJ8 U2.AJ9 U2.AJ11 U2.AJ12 U2.AJ14 U2.AJ15 U2.AJ17 U2.AJ18 U2.AJ20 U2.AJ21 U2.AJ23 U2.AJ24 U2.AJ26 U2.AJ27 U2.AJ28 U2.AJ29 U2.AL1 U2.AL31 U2.B5 U2.B31 U2.C8 U2.C9 U2.C11 U2.C12 U2.C14 U2.C15 U2.C17 U2.C18 U2.C20 U2.C21 U2.C23 U2.C24 U2.C26 U2.C28 U2.C29 U2.D5 U2.D29 U2.E2 U2.E4 U2.E7 U2.E12 U2.E15 U2.E18 U2.E21 U2.E24 U2.E31 U2.F8 U2.F15 U2.F18 U2.F20 U2.F21 U2.G5 U2.G9 U2.G18 U2.G27 U2.H3 U2.H9 U2.H10 U2.H11 U2.H12 U2.H13 U2.H15 U2.H16 U2.H17 U2.H18 U2.H19 U2.H26 U2.J3 U2.J6 U2.J7 U2.J8 U2.J9 U2.J10 U2.J21 U2.K8 U2.K9 U2.K10 U2.K12 U2.K14 U2.K16 U2.K18 U2.K20 U2.K22 U2.L3 U2.L6 U2.L8 U2.L11 U2.L12 U2.L13 U2.L14 U2.L15 U2.L16 U2.L20 U2.L22 U2.L27 U2.M3 U2.M8 U2.M10 U2.M16 U2.M23 U2.N8 U2.N13 U2.N14 U2.N15 U2.N16 U2.N17 U2.N19 U2.N21 U2.P3 U2.P6 U2.P7 U2.P8 U2.P10 U2.P11 U2.P12 U2.P16 U2.P17 U2.P19 U2.P21 U2.R3 U2.R5 U2.R6 U2.R14 U2.R15 U2.R16 U2.R18 U2.R21 U2.R23 U2.T8 U2.T10 U2.T16 U2.T18 U2.T19 U2.T21 U2.U3 U2.U8 U2.U11 U2.U12 U2.U14 U2.U15 U2.U16 U2.U19 U2.U21 U2.U22 U2.U23 U2.U29 U2.V3 U2.V5 U2.V8 U2.V10 U2.V17 U2.V23 U2.W8 U2.W9 U2.W13 U2.W17 U2.W18 U2.W19 U2.W21 U2.W22 U2.W23 U2.W30 U2.Y3 U2.Y9 U2.Y10 U2.Y11 U2.Y12 U2.Y13 U2.Y14 U2.Y15 U2.Y16 U2.Y17 U2.Y20 U2.Y23 U2.Y29
PMU_EXT_EN: U1.55
PMU_I2C_SCL: U1.19
PMU_I2C_SDA: U1.18
PMU_INT: U1.49
PMU_NRESET: U1.20
PMU_POWER_ON: U1.51
PMU_SLEEP: U1.50
PMU_VDET: U1.34
VCC_IN: U1.4 U1.23 U1.24 U1.32 U1.44 U1.45 U1.59 U1.60
VCC_RTC: U1.9 U1.52 U1.53
VDD_BIGCPU: U2.K19 U2.K21 U2.L18 U2.L19 U2.L21 U2.L23 U2.M18 U2.M19 U2.M20 U2.M21 U2.M22 U2.N20 U2.N22
VDD_CENTER: U2.M11 U2.M12 U2.M13 U2.M14 U2.M15 U2.N11 U2.N12 U2.P13 U2.P14 U2.P15
VDD_GPU: U2.R11 U2.R12 U2.R13 U2.T11 U2.T12 U2.T13 U2.T14 U2.U13 U2.V11 U2.V12 U2.V13 U2.V14 U2.V15 U2.V16 U2.W10 U2.W11 U2.W12 U2.W14 U2.W15 U2.W16
VDD_LITTLECPU: U2.P20 U2.P22 U2.R19 U2.R20 U2.R22 U2.T20 U2.T22
pads on no net: U1.1 U1.2 U1.3 U1.5 U1.6 U1.7 U1.8 U1.10 U1.11 U1.12 U1.13 U1.14 U1.15 U1.16 U1.17 U1.25 U1.26 U1.29 U1.31 U1.33 U1.35 U1.36 U1.37 U1.39 U1.42 U1.43 U1.47 U1.48 U1.54 U1.56 U1.58 U1.61 U1.63 U1.65 U1.66 U1.67 U1.68 U2.A2 U2.A3 U2.A4 U2.A5 U2.A6 U2.A7 U2.A8 U2.A9 U2.A10 U2.A11 U2.A12 U2.A13 U2.A14 U2.A15 U2.A16 U2.A17 U2.A18 U2.A19 U2.A20 U2.A21 U2.A22 U2.A23 U2.A24 U2.A25 U2.A26 U2.A28 U2.A29 U2.A30 U2.AA1 U2.AA2 U2.AA4 U2.AA6 U2.AA7 U2.AA8 U2.AA16 U2.AA17 U2.AA18 U2.AA19 U2.AA20 U2.AA21 U2.AA22 U2.AA24 U2.AA25 U2.AA27 U2.AA28 U2.AA30 U2.AA31 U2.AB1 U2.AB2 U2.AB8 U2.AB12 U2.AB14 U2.AB18 U2.AB20 U2.AB21 U2.AB22 U2.AB24 U2.AB30 U2.AB31 U2.AC1 U2.AC2 U2.AC4 U2.AC5 U2.AC6 U2.AC7 U2.AC8 U2.AC9 U2.AC10 U2.AC12 U2.AC14 U2.AC19 U2.AC24 U2.AC27 U2.AC28 U2.AC30 U2.AC31 U2.AD1 U2.AD2 U2.AD4 U2.AD6 U2.AD7 U2.AD8 U2.AD9 U2.AD11 U2.AD12 U2.AD14 U2.AD15 U2.AD16 U2.AD18 U2.AD19 U2.AD20 U2.AD23 U2.AD24 U2.AD25 U2.AD27 U2.AD28 U2.AD30 U2.AD31 U2.AE1 U2.AE2 U2.AE5 U2.AE6 U2.AE8 U2.AE9 U2.AE15 U2.AE18 U2.AE20 U2.AE21 U2.AE24 U2.AE26 U2.AE30 U2.AE31 U2.AF1 U2.AF2 U2.AF3 U2.AF4 U2.AF5 U2.AF7 U2.AF8 U2.AF11 U2.AF12 U2.AF14 U2.AF15 U2.AF21 U2.AF25 U2.AF27 U2.AF28 U2.AF30 U2.AF31 U2.AG1 U2.AG3 U2.AG4 U2.AG6 U2.AG7 U2.AG8 U2.AG9 U2.AG11 U2.AG12 U2.AG14 U2.AG15 U2.AG17 U2.AG18 U2.AG20 U2.AG21 U2.AG23 U2.AG24 U2.AG25 U2.AG26 U2.AG28 U2.AG30 U2.AG31 U2.AH1 U2.AH2 U2.AH3 U2.AH5 U2.AH6 U2.AH8 U2.AH9 U2.AH11 U2.AH12 U2.AH14 U2.AH15 U2.AH17 U2.AH18 U2.AH20 U2.AH21 U2.AH23 U2.AH24 U2.AH26 U2.AH27 U2.AH30 U2.AH31 U2.AJ1 U2.AJ2 U2.AJ3 U2.AJ4 U2.AJ30 U2.AJ31 U2.AK1 U2.AK2 U2.AK3 U2.AK4 U2.AK5 U2.AK6 U2.AK7 U2.AK8 U2.AK9 U2.AK10 U2.AK11 U2.AK12 U2.AK13 U2.AK14 U2.AK15 U2.AK16 U2.AK17 U2.AK18 U2.AK19 U2.AK20 U2.AK21 U2.AK22 U2.AK23 U2.AK24 U2.AK25 U2.AK26 U2.AK27 U2.AK28 U2.AK29 U2.AK30 U2.AK31 U2.AL2 U2.AL3 U2.AL4 U2.AL5 U2.AL6 U2.AL7 U2.AL8 U2.AL9 U2.AL10 U2.AL11 U2.AL12 U2.AL13 U2.AL14 U2.AL15 U2.AL16 U2.AL17 U2.AL18 U2.AL19 U2.AL20 U2.AL21 U2.AL22 U2.AL23 U2.AL24 U2.AL25 U2.AL26 U2.AL27 U2.AL28 U2.AL29 U2.AL30 U2.B1 U2.B2 U2.B3 U2.B4 U2.B6 U2.B7 U2.B8 U2.B9 U2.B10 U2.B11 U2.B12 U2.B13 U2.B14 U2.B15 U2.B16 U2.B17 U2.B18 U2.B19 U2.B20 U2.B21 U2.B22 U2.B23 U2.B24 U2.B25 U2.B26 U2.B27 U2.B28 U2.B29 U2.B30 U2.C1 U2.C2 U2.C3 U2.C4 U2.C5 U2.C6 U2.C27 U2.C30 U2.C31 U2.D1 U2.D2 U2.D3 U2.D6 U2.D8 U2.D9 U2.D11 U2.D12 U2.D14 U2.D15 U2.D17 U2.D18 U2.D20 U2.D21 U2.D23 U2.D24 U2.D26 U2.D27 U2.D30 U2.D31 U2.E1 U2.E3 U2.E6 U2.E8 U2.E9 U2.E11 U2.E14 U2.E17 U2.E20 U2.E23 U2.E25 U2.E26 U2.E28 U2.E29 U2.E30 U2.F1 U2.F2 U2.F3 U2.F4 U2.F5 U2.F7 U2.F9 U2.F11 U2.F12 U2.F14 U2.F17 U2.F23 U2.F24 U2.F25 U2.F27 U2.F28 U2.F29 U2.F30 U2.F31 U2.G1 U2.G2 U2.G6 U2.G8 U2.G11 U2.G12 U2.G14 U2.G15 U2.G17 U2.G20 U2.G21 U2.G23 U2.G24 U2.G26 U2.G30 U2.G31 U2.H1 U2.H2 U2.H4 U2.H5 U2.H6 U2.H7 U2.H14 U2.H20 U2.H21 U2.H22 U2.H23 U2.H24 U2.H25 U2.H27 U2.H28 U2.H29 U2.H30 U2.H31 U2.J1 U2.J2 U2.J4 U2.J5 U2.J11 U2.J12 U2.J13 U2.J14 U2.J15 U2.J16 U2.J17 U2.J18 U2.J19 U2.J20 U2.J22 U2.J23 U2.J24 U2.J25 U2.J26 U2.J27 U2.J28 U2.J29 U2.J30 U2.J31 U2.K1 U2.K2 U2.K11 U2.K13 U2.K15 U2.K17 U2.K23 U2.K24 U2.K30 U2.K31 U2.L1 U2.L2 U2.L4 U2.L5 U2.L7 U2.L9 U2.L10 U2.L17 U2.L24 U2.L25 U2.L26 U2.L28 U2.L29 U2.L30 U2.L31 U2.M1 U2.M2 U2.M4 U2.M5 U2.M6 U2.M7 U2.M9 U2.M17 U2.M24 U2.M25 U2.M26 U2.M27 U2.M28 U2.M29 U2.M30 U2.M31 U2.N1 U2.N2 U2.N9 U2.N10 U2.N18 U2.N23 U2.N24 U2.N30 U2.N31 U2.P1 U2.P2 U2.P4 U2.P5 U2.P9 U2.P18 U2.P23 U2.P24 U2.P25 U2.P26 U2.P27 U2.P28 U2.P29 U2.P30 U2.P31 U2.R1 U2.R2 U2.R4 U2.R7 U2.R8 U2.R9 U2.R10 U2.R17 U2.R24 U2.R25 U2.R26 U2.R27 U2.R28 U2.R29 U2.R30 U2.R31 U2.T1 U2.T2 U2.T9 U2.T15 U2.T17 U2.T23 U2.T24 U2.T30 U2.T31 U2.U1 U2.U2 U2.U4 U2.U5 U2.U6 U2.U7 U2.U9 U2.U10 U2.U17 U2.U18 U2.U20 U2.U24 U2.U25 U2.U26 U2.U27 U2.U28 U2.U30 U2.U31 U2.V1 U2.V2 U2.V4 U2.V6 U2.V7 U2.V9 U2.V18 U2.V19 U2.V20 U2.V21 U2.V22 U2.V24 U2.V25 U2.V26 U2.V27 U2.V28 U2.V29 U2.V30 U2.V31 U2.W1 U2.W2 U2.W20 U2.W24 U2.W31 U2.Y1 U2.Y2 U2.Y4 U2.Y5 U2.Y6 U2.Y7 U2.Y8 U2.Y18 U2.Y19 U2.Y21 U2.Y22 U2.Y24 U2.Y25 U2.Y26 U2.Y27 U2.Y28 U2.Y30 U2.Y31 U3.A1 U3.A2 U3.A3 U3.A4 U3.A5 U3.A8 U3.A9 U3.A10 U3.A11 U3.A12 U3.AA1 U3.AA2 U3.AA3 U3.AA4 U3.AA5 U3.AA8 U3.AA9 U3.AA10 U3.AA11 U3.AA12 U3.AB1 U3.AB2 U3.AB3 U3.AB4 U3.AB5 U3.AB8 U3.AB9 U3.AB10 U3.AB11 U3.AB12 U3.B1 U3.B2 U3.B3 U3.B4 U3.B5 U3.B8 U3.B9 U3.B10 U3.B11 U3.B12 U3.C1 U3.C2 U3.C3 U3.C4 U3.C5 U3.C8 U3.C9 U3.C10 U3.C11 U3.C12 U3.D1 U3.D2 U3.D3 U3.D4 U3.D5 U3.D8 U3.D9 U3.D10 U3.D11 U3.D12 U3.E1 U3.E2 U3.E3 U3.E4 U3.E5 U3.E8 U3.E9 U3.E10 U3.E11 U3.E12 U3.F1 U3.F2 U3.F3 U3.F4 U3.F5 U3.F8 U3.F9 U3.F10 U3.F11 U3.F12 U3.G1 U3.G2 U3.G3 U3.G4 U3.G5 U3.G8 U3.G9 U3.G10 U3.G11 U3.G12 U3.H1 U3.H2 U3.H3 U3.H4 U3.H5 U3.H8 U3.H9 U3.H10 U3.H11 U3.H12 U3.J1 U3.J2 U3.J3 U3.J4 U3.J5 U3.J8 U3.J9 U3.J10 U3.J11 U3.J12 U3.K1 U3.K2 U3.K3 U3.K4 U3.K5 U3.K8 U3.K9 U3.K10 U3.K11 U3.K12 U3.N1 U3.N2 U3.N3 U3.N4 U3.N5 U3.N8 U3.N9 U3.N10 U3.N11 U3.N12 U3.P1 U3.P2 U3.P3 U3.P4 U3.P5 U3.P8 U3.P9 U3.P10 U3.P11 U3.P12 U3.R1 U3.R2 U3.R3 U3.R4 U3.R5 U3.R8 U3.R9 U3.R10 U3.R11 U3.R12 U3.T1 U3.T2 U3.T3 U3.T4 U3.T5 U3.T8 U3.T9 U3.T10 U3.T11 U3.T12 U3.U1 U3.U2 U3.U3 U3.U4 U3.U5 U3.U8 U3.U9 U3.U10 U3.U11 U3.U12 U3.V1 U3.V2 U3.V3 U3.V4 U3.V5 U3.V8 U3.V9 U3.V10 U3.V11 U3.V12 U3.W1 U3.W2 U3.W3 U3.W4 U3.W5 U3.W8 U3.W9 U3.W10 U3.W11 U3.W12 U3.Y1 U3.Y2 U3.Y3 U3.Y4 U3.Y5 U3.Y8 U3.Y9 U3.Y10 U3.Y11 U3.Y12 U4.A1 U4.A2 U4.A3 U4.A4 U4.A5 U4.A8 U4.A9 U4.A10 U4.A11 U4.A12 U4.AA1 U4.AA2 U4.AA3 U4.AA4 U4.AA5 U4.AA8 U4.AA9 U4.AA10 U4.AA11 U4.AA12 U4.AB1 U4.AB2 U4.AB3 U4.AB4 U4.AB5 U4.AB8 U4.AB9 U4.AB10 U4.AB11 U4.AB12 U4.B1 U4.B2 U4.B3 U4.B4 U4.B5 U4.B8 U4.B9 U4.B10 U4.B11 U4.B12 U4.C1 U4.C2 U4.C3 U4.C4 U4.C5 U4.C8 U4.C9 U4.C10 U4.C11 U4.C12 U4.D1 U4.D2 U4.D3 U4.D4 U4.D5 U4.D8 U4.D9 U4.D10 U4.D11 U4.D12 U4.E1 U4.E2 U4.E3 U4.E4 U4.E5 U4.E8 U4.E9 U4.E10 U4.E11 U4.E12 U4.F1 U4.F2 U4.F3 U4.F4 U4.F5 U4.F8 U4.F9 U4.F10 U4.F11 U4.F12 U4.G1 U4.G2 U4.G3 U4.G4 U4.G5 U4.G8 U4.G9 U4.G10 U4.G11 U4.G12 U4.H1 U4.H2 U4.H3 U4.H4 U4.H5 U4.H8 U4.H9 U4.H10 U4.H11 U4.H12 U4.J1 U4.J2 U4.J3 U4.J4 U4.J5 U4.J8 U4.J9 U4.J10 U4.J11 U4.J12 U4.K1 U4.K2 U4.K3 U4.K4 U4.K5 U4.K8 U4.K9 U4.K10 U4.K11 U4.K12 U4.N1 U4.N2 U4.N3 U4.N4 U4.N5 U4.N8 U4.N9 U4.N10 U4.N11 U4.N12 U4.P1 U4.P2 U4.P3 U4.P4 U4.P5 U4.P8 U4.P9 U4.P10 U4.P11 U4.P12 U4.R1 U4.R2 U4.R3 U4.R4 U4.R5 U4.R8 U4.R9 U4.R10 U4.R11 U4.R12 U4.T1 U4.T2 U4.T3 U4.T4 U4.T5 U4.T8 U4.T9 U4.T10 U4.T11 U4.T12 U4.U1 U4.U2 U4.U3 U4.U4 U4.U5 U4.U8 U4.U9 U4.U10 U4.U11 U4.U12 U4.V1 U4.V2 U4.V3 U4.V4 U4.V5 U4.V8 U4.V9 U4.V10 U4.V11 U4.V12 U4.W1 U4.W2 U4.W3 U4.W4 U4.W5 U4.W8 U4.W9 U4.W10 U4.W11 U4.W12 U4.Y1 U4.Y2 U4.Y3 U4.Y4 U4.Y5 U4.Y8 U4.Y9 U4.Y10 U4.Y11 U4.Y12 U5.A1 U5.A2 U5.A3 U5.A4 U5.B1 U5.B2 U5.B3 U5.B4 U5.C1 U5.C2 U5.C3 U5.C4 U5.D1 U5.D2 U5.D3 U5.D4 U5.E1 U5.E2 U5.E3 U5.E4 U6.A1 U6.A2 U6.A3 U6.A4 U6.B1 U6.B2 U6.B3 U6.B4 U6.C1 U6.C2 U6.C3 U6.C4 U6.D1 U6.D2 U6.D3 U6.D4 U6.E1 U6.E2 U6.E3 U6.E4

## Silkscreen, mask and mechanical layers (free items; w line width, h text height)
Mechanical 1:
  the board outline again, w0.254